# Altium PCB POWER_SUPPLY.PcbDoc (part 5 of 5)
Units mm, origin at the board's own origin, x right, y up, seen from the top; angles counter-clockwise.
Board outline 115 x 115 mm, 2 copper layers (Top Layer, Bottom Layer), stack 1.58 mm thick; 91 components, 48 nets, 207 pads, 26 vias.
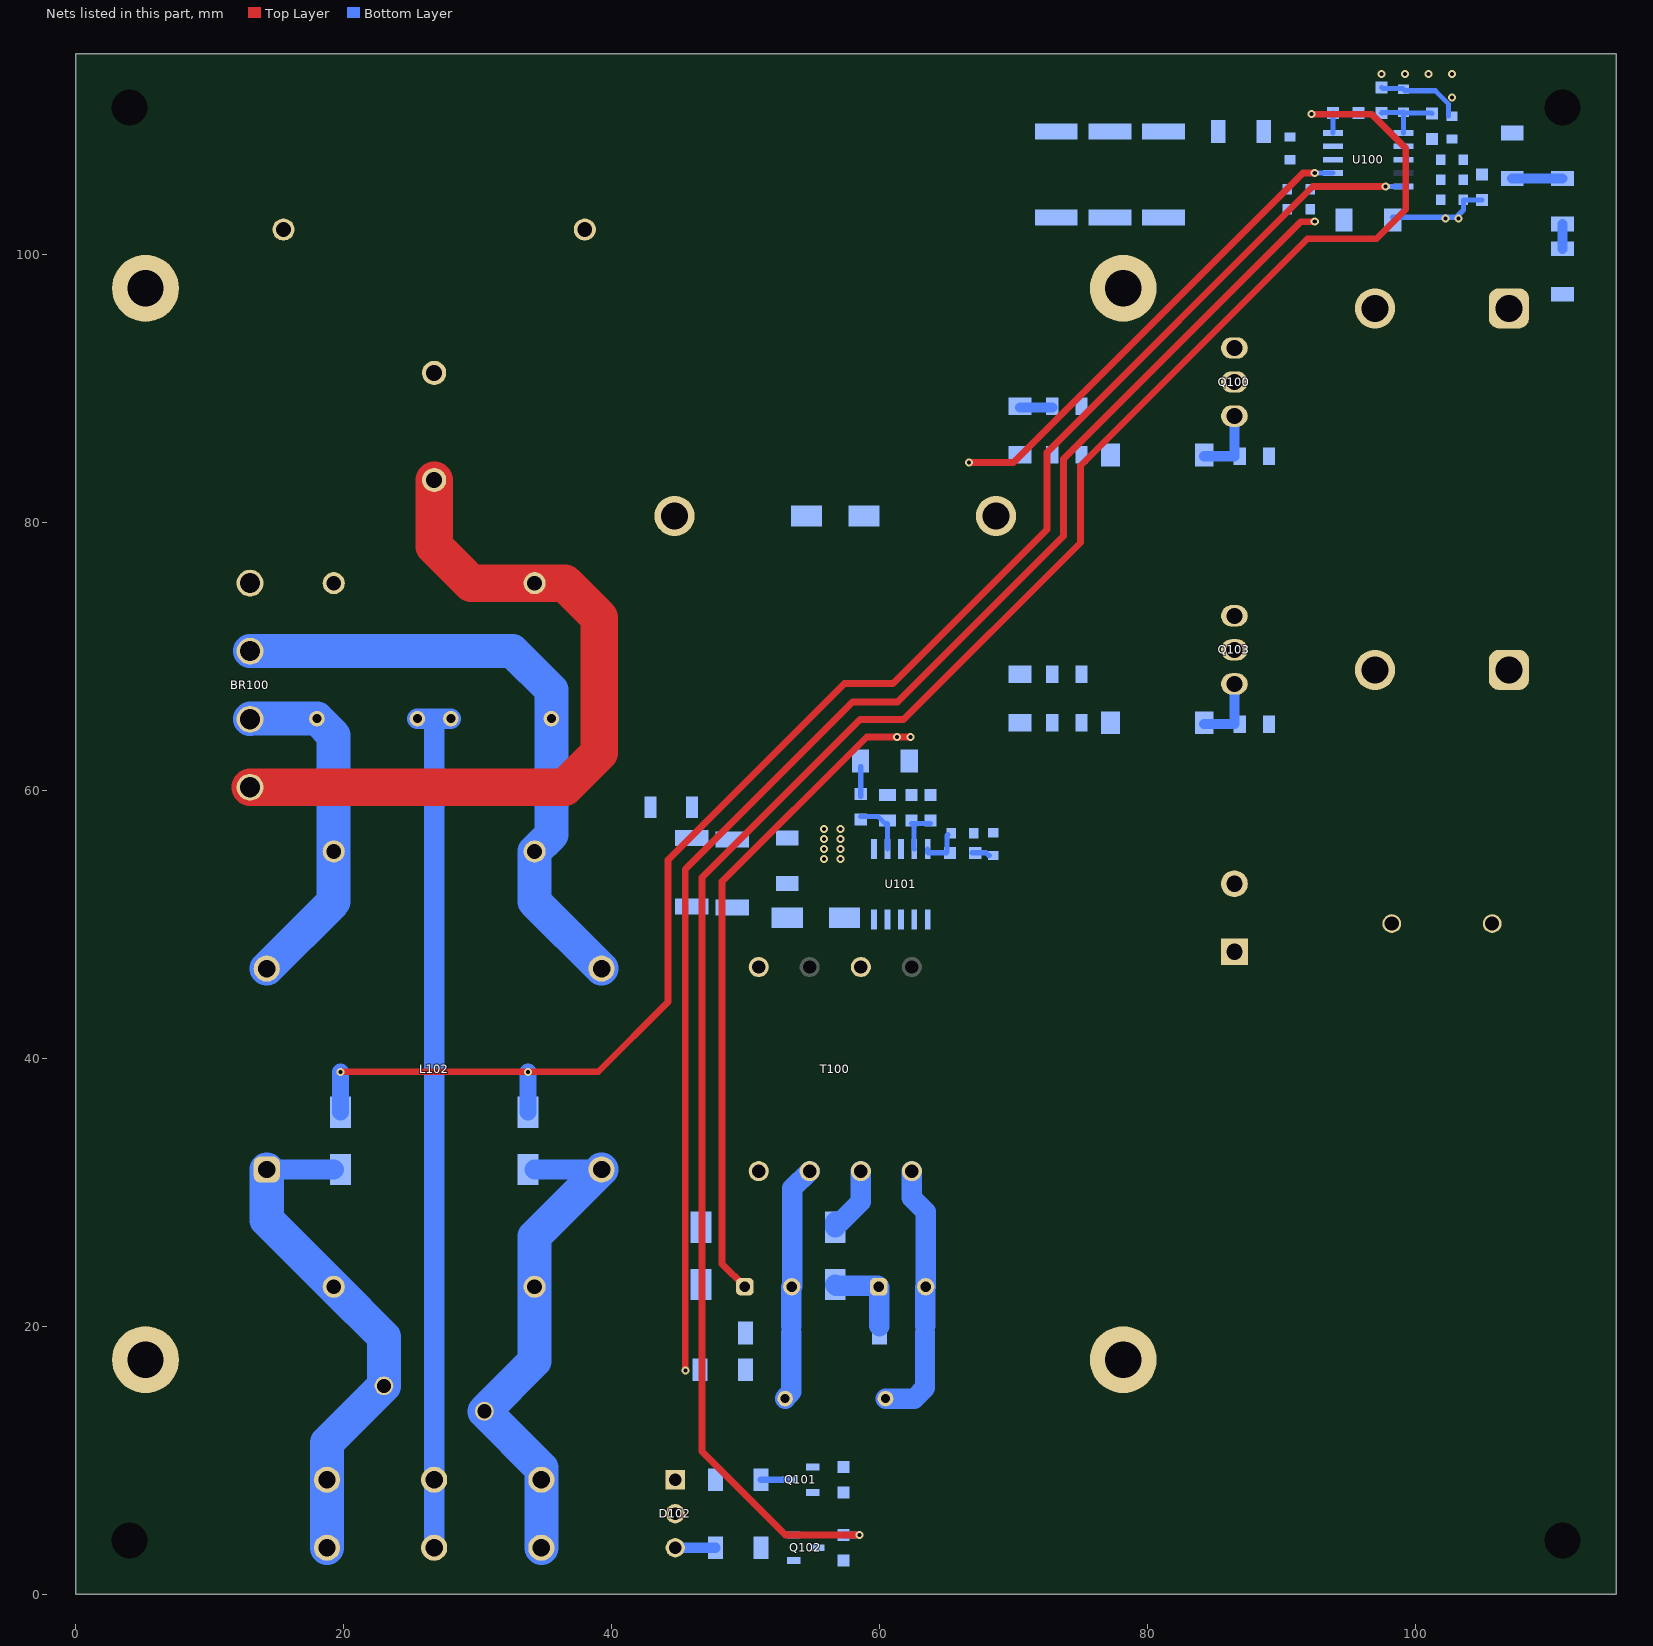
[diagram p2: the nets of this part, all layers, seen from the top]

## Polygon pours and split planes (outlines as drawn) (continued)
NetJP101_1 on Bottom Layer "NETJP101_1_L02_P058" (solid, pour order 58): 74.5,64.2 74.9,63.8 77.6,63.8 78,64.2 78,65.9 77.6,66.3 76.1,66.3 75.8,66.6 75.8,69.4 75.6,69.6 74.7,69.6 74.5,69.4
DRAIN_PFC on Bottom Layer "DRAIN_PFC_L02_P028" (solid, pour order 28): 87.1,91.3 87.5,90.9 87.5,90.1 87.1,89.7 83.7,89.7 82.6,88.6 82.6,72.3 83.6,71.3 87.1,71.3 87.5,70.9 87.5,70.1 87.1,69.7 83.6,69.7 82.6,68.7 82.6,55.65 83.75,54.5 87.1,54.5 87.5,54.1 87.5,51.95 86.8,51.25 83,51.25 78.5,55.75 78.5,71.75 72,78.25 67.5,78.25 66.75,79 66.75,82 67.5,82.75 77.55,82.75 78.5,83.7 78.5,90.75 79.05,91.3
GND_PFC on Bottom Layer "GND_PFC_L02_P056" (solid, pour order 56): 83.5,82.3 84,82.8 87.55,82.8 88.25,83.5 90.25,83.5 90.25,72.2 84,72.2 83.5,72.7
GND_PFC on Bottom Layer "GND_PFC_L02_P055" (solid, pour order 55): 83.5,82.2 84.1,82.8 87.55,82.8 89,84.25 91,84.25 91,72.75 83.5,72.75
NetBR100_4 on Bottom Layer "NETBR100_4_L02_P000" (solid, pour order 0): 1.5,15 2.75,13.75 7.5,13.75 8.75,15 8.75,100.5 7.5,101.75 2.75,101.75 1.5,100.5
DRAIN_FLYBACK on Bottom Layer "DRAIN_FLYBACK_L02_P043" (solid, pour order 43): 55.75,49.75 56.25,49.25 57,49.25 57.5,48.75 57.5,46.5 58,46 59.25,46 59.75,46.5 59.75,48.75 60.25,49.25 65.15,49.25 65.6,49.7 65.6,51 65.1,51.5 56.25,51.5 55.75,51
NetJP100_2 on Bottom Layer "NETJP100_2_L02_P036" (solid, pour order 36): 84,88.8 83.5,88.3 83.5,84.2 84,83.7 87.1,83.7 87.5,84.1 87.5,88.4 87.1,88.8
NetJP101_2 on Bottom Layer "NETJP101_2_L02_P035" (solid, pour order 35): 84,68.8 83.5,68.3 83.5,64.25 84.05,63.7 87.1,63.7 87.5,64.1 87.5,68.4 87.1,68.8
+400V_PFC on Bottom Layer "+400V_PFC_L02_P034" (solid, pour order 34): 104.75,97.25 105.5,98 108,98 109.25,96.75 109.25,50 106.5,47.25 105.25,47.25 103.25,49.25 103.25,50.5 104.75,52
GND_PFC on Bottom Layer "GND_PFC_L02_P033" (solid, pour order 33): 85.5,73.5 85.5,72.5 85.8,72.2 87.55,72.2 88.5,71.25 90,71.25 90,75 88.5,75 87.5,74 86,74
GND_PFC on Top Layer "GND_PFC_L01_P148" (solid, pour order 148): 80.8,28.2 80.8,16 79.6,14.8 76.5,14.8 75.3,16 75.3,29.7 70.1,34.9 70.1,36.2 75.3,41.4 75.3,44.9 80.8,44.9
GND_PFC on Top Layer "GND_PFC_L01_P147" (solid, pour order 147): 55.3,57.5 55.3,54.7 56,54 71.4,54 78.2,47.2 80.8,47.2 80.8,65.1 78.1,65.1 71.2,58.2 56,58.2
GND_PFC on Top Layer "GND_PFC_L01_P145" (solid, pour order 145): 75.3,40.2 71.6,36.5 56.5,36.5 53.75,33.75 53.75,31 54.25,30.5 55.5,30.5 56,31 56,32.75 57.5,34.25 75.35,34.25 80.8,39.7 80.8,75.05 83.5,77.75 93.25,77.75 98.5,83 98.5,97 97.75,97.75 96.25,97.75 95.5,97 95.5,84.75 91.5,80.75 82,80.75 75.3,74.05
GND_PFC on Top Layer "GND_PFC_L01_P141" (solid, pour order 141): 96.8,113.8 96.8,112.5 97.3,112 101,112 101.7,111.3 101.7,101.8 102.1,101.4 103.5,101.4 103.9,101.8 103.9,113.2 102.9,114.2 97.2,114.2

## Silkscreen, mask and mechanical layers (free items; w line width, h text height)
Top Overlay:
  text "JUL/2026 - REV: 0.1" at 94.751,15.211 h2
  text "LINE" at 17.221,0.407 h2
  text "EARTH" at 24.461,0.407 h2
  text "NEUTRAL" at 31.473,0.422 h2
Bottom Overlay:
  lines w0.1: 101.105,107.88 101.122,107.88 101.123,107.881
  lines w0.15: 101.105,107.88 101.105,104.403 101.1,98.4 101.6,98.4 107.3,98.4 107.3,99.4 107.3,103.5 105.9,103.5 105.9,107.881 101.123,107.881 ; 57.7,56.8 57.7,60.573 63.427,60.573 76.5,60.573 76.5,58.9 64.582,58.9 64.582,56.8 57.7,56.8
Info:
  drawing of 191 lines, arcs and shapes, not listed
  text "PCB Technical Specification /  / - Base Material: FR-4 / - Number of Layers: 2 / - Board Dimensions: 150 x 150 mm / - Surface Finish: HASL (With Lead) / - Outer Copper: 2 oz / - Via Covering: Plugged (or tented, whatever is cheaper) / - Min via hole size/diameter: 0.3mm/0.6mm / - Solder Mask: Top and Bottom (Green) / - Silkscreen: Top and Bottom (White)" at 128,32 h1.5
  text "Layer" at 130.2,25.2 h1.5
  text "Name" at 140.348,25.2 h1.5
  text "Material" at 163.491,25.2 h1.5
  text "Thickness" at 184.886,25.2 h1.5
  text "Constant" at 201.031,25.2 h1.5
  text "Board Layer Stack" at 215.178,25.2 h1.5
  text "Top Overlay" at 140.348,22.2 h1.5
  text "Top Solder" at 140.348,19.2 h1.5
  text "Solder Resist" at 163.491,19.2 h1.5
  text "0.010mm" at 184.886,19.2 h1.5
  text "3.5" at 201.031,19.2 h1.5
  text "1" at 130.2,16.2 h1.5
  text "Top Layer" at 140.348,16.2 h1.5
  text "0.070mm" at 184.886,16.2 h1.5
  text "Dielectric 1" at 140.348,13.2 h1.5
  text "FR-4" at 163.491,13.2 h1.5
  text "1.440mm" at 184.886,13.2 h1.5
  text "4.8" at 201.031,13.2 h1.5
  text "2" at 130.2,10.2 h1.5
  text "Bottom Layer" at 140.348,10.2 h1.5
  text "0.070mm" at 184.886,10.2 h1.5
  text "Bottom Solder" at 140.348,7.2 h1.5
  text "Solder Resist" at 163.491,7.2 h1.5
  text "0.010mm" at 184.886,7.2 h1.5
  text "3.5" at 201.031,7.2 h1.5
  text "Bottom Overlay" at 140.348,4.2 h1.5
  text "Total board thickness:" at 130.2,1.2 h1.5
  text "1.600mm" at 184.886,1.2 h1.5
Board:
  the board outline again, w0.5

## Dimensions
115,115 to 115,0 on Info
0,115 to 115,115 on Info

## Text inside footprints (layer, text, board x,y; h text height)
C100: Top Overlay "+" at 110,85.5 h1.5
C101: Top Overlay "+" at 110.25,58.25 h1.5
C116: Top Overlay "+" at 58.5,27.75 h1.5 r180
C118: Top Overlay "+" at 48.5,28 h1.5 r180